# Altium PCB ACSR-RC-V2.0.PcbDoc (part 2 of 3)
Units mm, origin at the board's own origin, x right, y up, seen from the top; angles counter-clockwise.
Board outline 93 x 128 mm, 2 copper layers (Top Layer, Bottom Layer); 207 components, 178 nets, 884 pads, 664 vias.
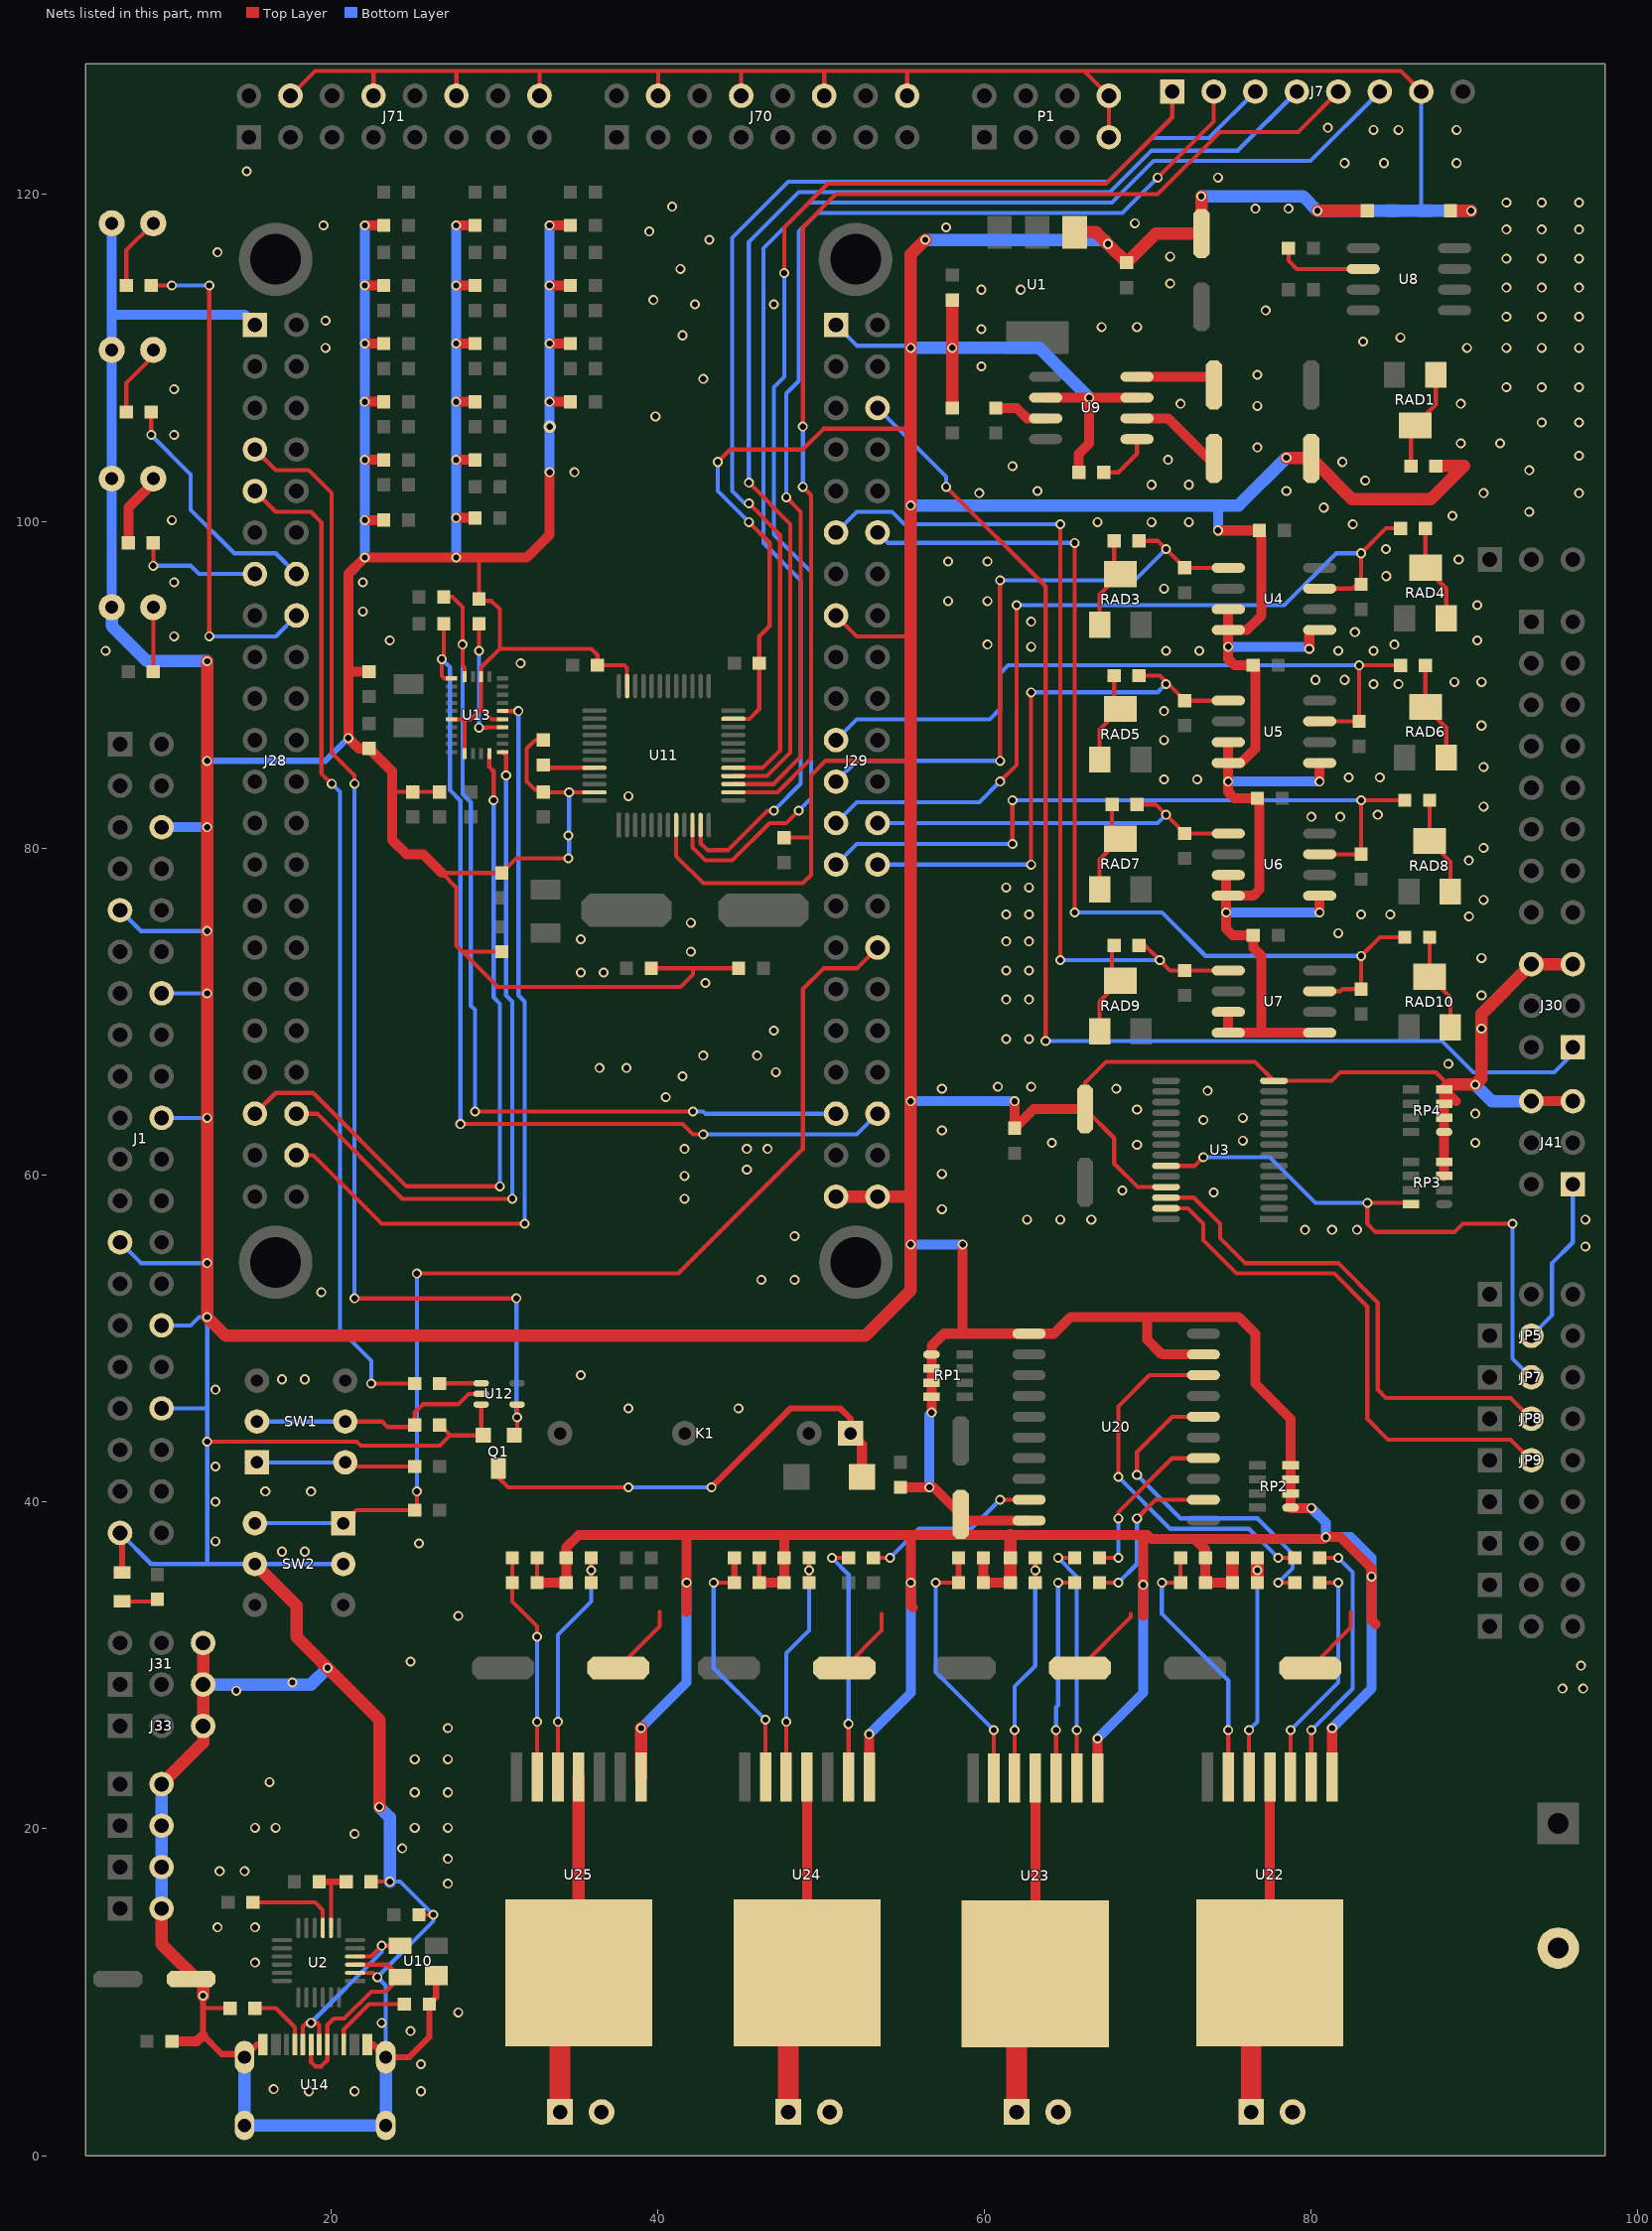
[diagram p2: the nets of this part, all layers, seen from the top]

## Via types
v1: diameter 0.61, hole 0.381, Top Layer to Bottom Layer, 661 vias
v2: diameter 0.762, hole 0.381, Top Layer to Bottom Layer, 3 vias

## Nets (pads, with @x,y where several pads share a name; then routed paths per layer and width w, separated by ;. In a path a pad name is that pad's centre, name@x,y a point inside that pad or via, vN(x,y) a via of type N, cw(c..) or ccw(c..) an arc to the next point about the centre after c; other vN are vias at no path point) (continued)
BNO_NRST: J28.42 U13.11 | length 48.2
  Top Layer w0.254: J28.42@17.907,61.214 18.923,61.214 23.114,57.023 v1(31.877,57.023) ; U13.11@30.518,88.388 v1(31.492,88.388)
  Bottom Layer w0.254: v1(31.492,88.388) 31.496,88.384 31.496,70.993 31.877,70.612 v1(31.877,57.023)
BNO_P0: J28.40 U13.6 | length 43
  Top Layer w0.254: J28.40@17.907,63.754 19.177,63.754 24.384,58.547 v1(31.115,58.547) ; U13.6@30.518,85.888 30.734,85.672 v1(30.734,84.455)
  Bottom Layer w0.254: v1(30.734,84.455) 30.734,70.993 31.115,70.612 v1(31.115,58.547)
BNO_P1: J28.39 U13.5 | length 44.6
  Top Layer w0.254: J28.39@15.367,63.754 16.637,65.024 18.923,65.024 24.638,59.309 v1(30.353,59.309) ; U13.5@29.706,85.776 29.706,84.975 29.972,84.709 v1(29.972,82.931)
  Bottom Layer w0.254: v1(29.972,82.931) 29.972,70.866 30.353,70.485 v1(30.353,59.309)
BNO_SCL: J29.39 R51.1 U13.19 | length 56.7
  Top Layer w0.254: R51.1@26.924,95.377 27.432,95.377 28.067,94.742 v1(28.067,92.456) 28.067,91.186 28.206,91.047 U13.19@28.206,90.5 ; v1(28.829,63.881) v1(42.164,63.881)
  Bottom Layer w0.254: v1(28.067,92.456) 28.067,83.312 28.575,82.804 28.575,70.358 28.829,70.104 v1(28.829,63.881) ; v1(42.164,63.881) 42.799,63.881 42.926,63.754 J29.39@50.927,63.754
BNO_SDA: J29.40 R52.1 U13.20 | length 59.1
  Top Layer w0.254: v1(26.797,91.567) 26.797,90.551 26.96,90.388 U13.20@27.394,90.388 ; R52.1@26.797,93.599 R52.1@26.924,93.726 ; v1@26.924,91.44 R52.1@26.924,93.472 ; v1(27.94,63.119) 41.529,63.119 42.164,62.484 v1(42.799,62.484)
  Bottom Layer w0.254: v1(26.797,91.567) 27.305,91.059 27.305,83.535 27.94,82.9 v1(27.94,63.119) ; v1(42.799,62.484) 52.197,62.484 J29.40@53.467,63.754
BTN7970_OUTPUT_0: J2.1 U22.4 U22.8 | length 21
  Top Layer w0.61: U22.8@77.47,11.176 U22.4@77.47,23.176
  Top Layer w1.27: J2.1@76.327,2.667 76.327,10.033 U22.8@77.47,11.176
BTN7970_OUTPUT_1: J4.1 U23.4 U23.8 | length 20.9
  Top Layer w0.61: U23.8@63.119,11.114 U23.4@63.119,23.114
  Top Layer w1.27: J4.1@61.976,2.667 61.976,9.971 U23.8@63.119,11.114
BTN7970_OUTPUT_2: J5.1 U24.4 U24.8 | length 21
  Top Layer w0.61: U24.8@49.149,11.176 U24.4@49.149,23.176
  Top Layer w1.27: J5.1@48.006,2.667 48.006,10.033 U24.8@49.149,11.176
BTN7970_OUTPUT_3: J6.1 U25.4 U25.8 | length 21
  Top Layer w0.762: U25.8@35.179,11.176 U25.4@35.179,23.176
  Top Layer w1.27: J6.1@34.036,2.667 34.036,10.033 U25.8@35.179,11.176
D+: U2.3 U10.4 U14.A6 U14.B6 | length 13.2
  Top Layer w0.254: U14.A6@18.8,6.792 18.8,5.711 19.05,5.461 19.431,5.461 19.8,5.83 U14.B6@19.8,6.792 19.8,7.989 20.193,8.382 20.828,8.382 22.479,10.033 23.368,10.033 U10.4@24.257,10.922 23.495,11.684 U2.3@21.493,11.684
D-: U2.4 U10.3 U14.A7 U14.B7 | length 13
  Top Layer w0.254: U14.B7@18.3,6.792 18.3,7.886 18.542,8.128 v1(18.796,8.128) 19.177,8.128 19.304,8.001 19.304,6.796 U14.A7@19.3,6.792 ; U2.4@21.493,12.184 22.471,12.184 v1(23.129,12.842) U10.3@24.257,12.842
  Bottom Layer w0.254: v1(18.796,8.128) 23.129,12.461 v1(23.129,12.842)
ESC_INPUT: J29.6 J30.1 | length 76.9
  Top Layer w0.254: v1(57.658,102.108) 63.754,96.012 v1(63.754,68.199)
  Bottom Layer w0.254: J29.6@53.467,106.934 57.658,102.743 v1(57.658,102.108) ; v1(63.754,68.199) 88.011,68.199 89.916,66.294 94.869,66.294 96.012,67.437 J30.1@96.012,67.818
ESC_OUTPUT: J41.1 JP5.2 | length 10.3
  Bottom Layer w0.254: JP5.2@93.472,50.165 94.742,51.435 94.742,54.61 96.012,55.88 J41.1@96.012,59.436
FORCE00: C11.1 J29.23 R7.2 U4.1 | length 38.1
  Top Layer w0.254: v1(60.96,85.344) v1(60.96,96.393) ; R7.2@69.469,98.806 70.612,98.806 v1(71.12,98.298) C11.1@72.263,97.155 U4.1@74.295,97.155
  Bottom Layer w0.254: J29.23@50.927,84.074 52.197,85.344 v1(60.96,85.344) ; v1(60.96,96.393) 69.215,96.393 v1(71.12,98.298)
FORCE01: C12.1 J29.25 R8.1 U4.7 | length 52.8
  Top Layer w0.254: v1(60.96,84.074) 61.976,85.09 v1(61.976,94.869) ; U4.7@80.518,95.885 82.55,95.885 83.058,96.393 v1(83.058,98.044) 84.582,99.568 R8.1@85.471,99.568
  Top Layer w0.61: U4.7@79.883,95.885 U4.7@80.518,95.885
  Bottom Layer w0.254: J29.25@50.927,81.534 52.197,82.804 59.69,82.804 v1(60.96,84.074) ; v1(61.976,94.869) 78.359,94.869 81.534,98.044 v1(83.058,98.044)
FORCE02: C13.1 J29.28 R9.2 U5.1 | length 34.4
  Top Layer w0.254: v1(62.865,78.994) v1(62.865,89.535) ; R9.2@69.469,90.551 70.739,90.551 C13.1@72.263,89.027 U5.1@74.803,89.027
  Bottom Layer w0.254: J29.28@53.467,78.994 v1(62.865,78.994) ; v1(62.865,89.535) 70.612,89.535 v1(71.12,90.043)
FORCE03: C14.1 J29.21 R10.1 U5.7 | length 44.1
  Top Layer w0.254: U5.7@80.391,87.757 U5.7@80.518,87.757 82.677,87.757 C14.1@82.804,87.884 ; C14.1@82.931,87.757 v1(82.931,91.186) R10.1@85.471,91.186
  Top Layer w0.61: U5.7@79.883,87.757 U5.7@80.391,87.757
  Bottom Layer w0.254: J29.21@50.927,86.614 52.197,87.884 60.325,87.884 60.96,88.519 60.96,90.678 61.468,91.186 v1(82.931,91.186)
FORCE04: C15.1 J29.26 R11.2 U6.1 | length 24.2
  Top Layer w0.254: R11.2@69.342,82.677 70.485,82.677 v1(71.12,82.042) C15.1@72.263,80.899 U6.1@74.93,80.899
  Bottom Layer w0.254: J29.26@53.467,81.534 70.612,81.534 v1(71.12,82.042)
FORCE05: C16.1 J29.27 R12.1 U6.7 | length 43.8
  Top Layer w0.254: v1(61.722,80.264) v1(61.722,82.931) ; U6.7@80.518,79.629 C16.1@83.058,79.629 v1(83.058,82.931) R12.1@85.725,82.931
  Bottom Layer w0.254: J29.27@50.927,78.994 52.197,80.264 v1(61.722,80.264) ; v1(61.722,82.931) v1(83.058,82.931)
FORCE06: C17.1 J29.11 R13.2 U7.1 | length 53.2
  Top Layer w0.254: v1@64.643,73.406 v1(64.643,99.822) ; R13.2@69.469,74.041 69.85,74.041 v1(70.739,73.152) 71.374,72.517 C17.1@72.263,72.517 U7.1@74.93,72.517
  Bottom Layer w0.254: J29.11@50.927,99.314 52.197,100.584 54.356,100.584 55.118,99.822 v1(64.643,99.822) ; v1(64.643,73.152) v1(70.739,73.152)
FORCE07: C18.1 J29.12 R14.1 U7.7 | length 61.3
  Top Layer w0.254: v1(65.532,76.073) v1(65.532,98.679) ; U7.7@80.518,71.247 81.788,71.247 81.915,71.374 C18.1@83.058,71.374 v1(83.058,73.406) 84.201,74.549 R14.1@85.725,74.549
  Bottom Layer w0.254: J29.12@53.467,99.314 54.102,98.679 v1(65.532,98.679) ; v1(65.532,76.073) 70.866,76.073 73.533,73.406 v1(83.058,73.406)
GND: C1.1 C2.2 C3.1 C5.1 C6.1 C7.1 C8.1 C9.1 C10.1 C19.2 C20.2 C21.2 C22.2 C23.2 C24.2 C25.2 C26.2 C27.2 C28.2 C29.2 C30.2 C31.2 C32.2 C33.2 C34.2 C35.1 C36.2 C37.2 C38.2 C39.2 C40.2 C41.1 C42.1 C43.2 C44.1 C45.2 C46.1 C47.1 C48.1 C49.1 C50.1 C51.1 C52.1 C53.1 C54.2 C55.2 C56.2 C57.2 C58.2 C59.2 C60.2 C61.1 C62.1 C63.1 C64.1 C65.1 C66.1 C67.1 C68.1 J1.6 J1.9 J1.14 J1.20 J1.25 J1.30 J1.34 J1.39 J2.2 J3.2 J4.2 J5.2 J6.2 J7.7 J28.1 J29.1 J29.15 J29.43 J29.44 J30.5 J30.6 J31.5 J31.6 J33.3 J41.5 J41.6 J50.2 J51.2 J52.2 J55.2 J70.4 J70.8 J70.12 J70.16 J71.4 J71.8 J71.12 J71.16 LED1.2 LED2.2 LED3.2 LED4.2 LED5.2 P1.7 P1.8 Q1.2 R1.1 R2.1 R4.1 R5.1 R35.1 R36.1 R38.1 R39.1 R41.1 R42.1 R44.1 R45.1 R49.2 R58.1 R65.2 RP1.1 RP1.2 RP1.3 RP1.4 RP2.1 RP2.2 RP2.3 RP2.4 RP3.3 RP3.4 RP4.1 RP4.2 RP4.3 RP4.4 SW2.2 SW2.5 U1.1 U2.2 U3.14 U3.25 U4.3 U4.4 U4.5 U5.3 U5.4 U5.5 U6.3 U6.4 U6.5 U7.3 U7.4 U7.5 U9.3 U9.6 U10.1 U11.8 U11.23 U11.35 U11.47 U12.3 U13.2 U13.10 U13.17 U13.25 U14.0 U14.1 U14.2 U14.3 U14.A1 U14.A12 U14.B1 U14.B12 U20.1 U20.10 U20.19 U22.1 U23.1 U24.1 U25.1 | length 1235.5
  Top Layer w0.254: 12.192,9.017 R5.1@13.843,9.017 ; v1(12.446,43.688) 21.59,43.688 21.844,43.434 26.67,43.434 27.305,44.069 ; J71.4@17.238,126.04 J71.4@17.389,126.191 ; J71.4@17.54,126.04 19.056,127.556 22.606,127.556 ; U2.2@21.493,11.184 22.598,11.184 v1(22.86,10.922) ; R65.2@22.479,16.764 v1(23.622,16.764) ; J71.8@22.62,126.04 22.62,127.542 22.606,127.556 ; 23.876,81.407 23.876,83.439 C53.1@25.019,83.439 C52.1@26.67,83.439 ; C42.1@25.4,14.732 v1(26.289,14.732) ; R49.2@26.67,44.704 27.305,44.069 ; U13.25@27.394,87.888 28.571,87.888 29.206,88.523 ; J71.12@27.7,126.04 27.7,127.542 27.686,127.556 ; U13.2@28.206,85.776 28.206,87.884 ; 29.083,97.79 C54.2@29.083,95.25 29.21,95.123 29.845,95.123 30.353,94.615 30.353,92.202 ; Q1.2@29.21,44.196 U12.3@29.21,45.959 ; Q1.2@29.337,44.069 27.305,44.069 ; C60.2@30.48,73.66 28.067,73.66 ; U13.10@30.518,87.888 29.841,87.888 29.206,88.523 ; R45.1@32.639,35.052 C67.1@32.639,36.576 ; J71.16@32.78,126.04 32.78,127.542 32.766,127.556 ; R1.1@33.02,86.614 32.512,86.614 32.004,86.106 32.004,84.074 32.512,83.566 32.893,83.566 C51.1@33.02,83.439 33.043,83.416 v1(34.592,83.416) U11.47@36.14,83.416 ; v1(34.544,79.375) 31.369,79.375 C59.2@30.48,78.486 26.797,78.486 27.686,77.597 27.686,74.041 28.067,73.66 ; C39.2@37.592,29.845 40.132,32.385 40.132,33.274 ; U11.35@38.14,89.916 38.14,91.019 37.973,91.186 C35.1@36.322,91.186 36.322,91.821 35.941,92.202 30.353,92.202 ; C57.2@39.624,72.644 42.164,72.644 ; J70.4@40.04,126.04 40.04,127.52 40.005,127.556 ; U11.8@41.14,81.416 41.14,79.51 42.799,77.851 48.895,77.851 49.403,78.359 49.403,80.645 ; v1(43.688,103.632) 44.45,104.394 48.895,104.394 50.165,105.664 55.499,105.664 ; U11.23@44.64,87.916 45.625,87.916 46.228,88.519 C49.1@46.228,91.313 46.228,92.964 46.863,93.599 46.863,98.679 v1(45.593,99.949) ; C58.2@44.958,72.644 42.164,72.644 ; J70.8@45.12,126.04 45.12,127.52 45.085,127.556 ; R42.1@46.228,35.052 C65.1@46.228,36.576 ; C50.1@47.752,80.645 49.403,80.645 ; J70.12@50.2,126.04 50.2,127.52 50.165,127.556 ; J29.15@50.927,94.234 52.197,92.964 55.499,92.964 ; C38.2@51.435,29.845 53.721,32.131 53.721,33.147 ; J70.16@55.28,126.04 55.28,127.52 55.245,127.556 ; 55.499,85.344 50.292,85.344 49.403,84.455 49.403,80.645 ; C37.2@65.852,29.845 68.961,32.954 68.961,33.147 ; P1.7@67.62,123.5 P1.8@67.62,126.04 66.105,127.556 ; U3.25@71.12,59.264 69.387,59.264 67.945,60.706 67.945,62.262 C43.2@66.167,64.04 66.167,65.659 67.437,66.929 76.559,66.929 U3.14@77.724,65.764 81.258,65.764 81.788,66.294 87.63,66.294 88.138,65.786 RP4.4@88.138,65.227 ; C36.2@79.949,29.845 82.423,32.319 82.423,33.274 ; J7.7@86.614,126.167 J7.7@86.741,126.04 ; J7.7@86.741,126.294 85.479,127.556 66.105,127.556 ; 22.606,127.556 27.686,127.556 ; 27.686,127.556 32.766,127.556 ; 28.067,73.66 30.226,71.501 41.402,71.501 42.164,72.263 42.164,72.644 ; 29.206,88.523 U13.17@29.206,90.5 29.206,91.055 30.353,92.202 ; 32.766,127.556 40.005,127.556 ; 40.005,127.556 45.085,127.556 ; 45.085,127.556 50.165,127.556 ; 50.165,127.556 55.245,127.556 ; 55.245,127.556 66.105,127.556
  Top Layer w0.381: J1.39@7.112,38.1 7.239,37.973 LED5.2@7.239,35.687 ; v1(12.192,9.779) 12.192,9.017 12.192,7.366 13.335,6.223 14.526,6.223 U14.0@14.725,6.024 15.493,6.792 U14.A1@15.7,6.792 ; U14.A12@22.4,6.792 22.607,6.792 U14.1@23.375,6.024 24.82,6.024 26.035,7.239 R4.1@26.035,9.271 26.457,9.693 U10.1@26.457,11.022
  Top Layer w0.61: C41.1@10.287,6.985 11.811,6.985 12.192,7.366 ; v1(22.098,100.076) C32.2@23.241,100.076 ; v1(22.098,103.759) C31.2@23.241,103.759 ; v1(22.098,107.315) C30.2@23.241,107.315 ; v1(22.098,110.871) C29.2@23.241,110.871 ; v1(22.098,114.427) C28.2@23.241,114.427 ; v1(22.098,118.11) C27.2@23.241,118.11 ; C56.2@22.352,90.805 21.082,90.805 ; 26.797,78.486 25.654,79.629 24.638,79.629 23.749,80.518 23.749,84.709 C55.2@22.352,86.106 21.717,86.106 v1(21.082,86.741) 21.082,90.805 ; v1(27.686,100.203) C22.2@28.829,100.203 ; v1(27.686,103.759) C21.2@28.829,103.759 ; v1(27.686,107.315) C20.2@28.829,107.315 ; v1(27.686,110.871) C19.2@28.829,110.871 ; v1(27.686,114.427) C34.2@28.829,114.427 ; v1(27.686,118.11) C33.2@28.829,118.11 ; R45.1@32.639,35.052 R44.1@34.417,35.052 ; v1(33.401,102.997) 33.401,99.187 32.004,97.79 29.083,97.79 v1(27.686,97.79) v1(22.098,97.79) 21.082,96.774 21.082,90.805 ; v1(33.401,107.315) C26.2@34.671,107.315 ; v1(33.401,110.871) C25.2@34.671,110.871 ; v1(33.401,114.427) C24.2@34.671,114.427 ; v1(33.401,118.11) C23.2@34.671,118.11 ; R44.1@34.417,35.306 C66.1@34.417,36.576 34.417,37.211 35.179,37.973 41.783,37.973 ; 41.783,33.274 v1(41.783,35.052) 41.783,37.973 ; R42.1@46.228,35.052 R41.1@47.752,35.052 C64.1@47.752,36.576 47.752,37.973 ; U24.1@52.959,23.176 v1(52.959,25.781) ; C46.1@54.864,40.894 v1(56.642,40.894) 56.896,40.894 C45.2@58.547,39.243 58.928,38.862 U20.10@62.738,38.862 ; 55.626,33.528 55.499,33.655 v1(55.499,35.052) 55.499,37.719 55.245,37.973 ; v1(56.769,45.466) RP1.4@56.769,46.431 RP1.3@56.769,47.295 RP1.2@56.769,48.158 RP1.1@56.769,49.022 56.769,49.53 57.531,50.292 58.547,50.292 ; v1(58.674,55.753) 58.674,50.419 58.547,50.292 ; C63.1@59.944,36.576 R39.1@59.944,35.052 R38.1@61.595,35.052 ; v1(61.849,64.516) C44.1@61.849,62.865 63.024,64.04 C43.2@66.167,64.04 ; U9.6@63.754,107.569 v1(66.421,107.569) ; R58.1@65.786,102.997 65.786,104.14 66.421,104.775 v1(66.421,107.569) ; U23.1@66.929,23.114 v1(66.929,25.527) ; U9.3@69.342,107.569 v1(66.421,107.569) ; 69.723,33.02 v1(69.723,34.925) 69.723,37.719 69.977,37.973 ; U20.19@73.406,49.022 70.866,49.022 69.977,49.911 69.977,51.308 ; v1(74.295,99.441) C7.1@76.835,99.441 ; U7.3@74.93,69.977 U7.4@74.93,68.707 76.962,68.707 ; U6.3@74.93,78.359 74.803,78.232 U6.4@74.803,77.089 ; U5.3@74.93,86.487 U5.4@74.93,85.217 ; U4.3@74.93,94.615 U4.4@74.93,93.345 ; R35.1@75.184,35.052 R36.1@73.533,35.052 C68.1@73.533,36.576 73.533,37.084 72.898,37.719 ; C8.1@76.454,91.186 75.311,91.186 74.93,91.567 v1(74.93,92.329) U4.4@74.93,93.345 ; C8.1@76.581,91.186 76.581,86.106 75.692,85.217 U5.4@74.93,85.217 ; C7.1@76.708,99.314 76.962,99.06 76.962,94.234 76.073,93.345 U4.4@74.93,93.345 ; v1(79.883,92.202) U4.5@79.883,93.345 ; v1(80.01,39.624) 78.765,39.624 RP2.1@78.74,39.649 RP2.2@78.74,40.513 RP2.3@78.74,41.377 RP2.4@78.74,42.24 78.74,45.085 76.581,47.244 76.581,50.292 75.565,51.308 69.977,51.308 ; U7.5@80.518,68.707 76.962,68.707 ; v1(80.518,76.073) U6.5@80.518,77.089 ; v1(80.518,84.074) U5.5@80.518,85.217 ; U22.1@81.28,23.176 v1(81.28,26.162) ; 83.947,32.512 83.693,32.766 v1(83.693,35.433) 83.693,35.941 81.788,37.846 v1(80.899,37.846) 80.772,37.719 72.898,37.719 ; RP3.3@88.138,59.944 RP3.4@88.138,60.808 RP4.1@88.138,62.636 RP4.2@88.138,63.5 RP4.3@88.138,64.364 RP4.4@88.138,65.227 88.849,64.516 ; J41.6@93.472,64.516 J41.5@96.012,64.516 ; 41.783,37.973 47.752,37.973 ; 47.752,37.973 55.245,37.973 ; 55.245,37.973 61.595,37.973 69.977,37.973 ; 58.547,50.292 U20.1@62.738,50.292 64.262,50.292 65.278,51.308 69.977,51.308 ; 69.977,37.973 70.231,37.719 72.898,37.719 ; U6.4@74.803,77.089 U6.4@74.93,77.089 76.454,77.089 76.835,77.47 76.835,83.058 C9.1@76.708,83.058 75.311,83.058 74.93,83.439 v1(74.93,84.074) U5.4@74.93,85.217 ; U6.4@74.803,77.089 v1(74.803,76.073) 74.803,75.057 75.184,74.676 C10.1@76.454,74.676 76.454,73.914 76.962,73.406 76.962,68.707
  Top Layer w0.762: J55.2@9.652,15.113 9.652,12.954 12.192,10.414 v1(12.192,9.779) ; J50.2@9.652,22.733 12.192,25.273 J33.3@12.192,26.289 ; J33.3@12.128,26.352 12.192,26.416 J31.5@12.192,28.829 J31.6@12.192,31.369 ; v1(12.446,91.44) v1(12.446,85.344) v1(12.446,81.28) v1(12.446,74.93) v1(12.446,71.12) v1(12.446,63.5) v1(12.446,54.61) v1(12.446,51.308) 13.589,50.165 52.705,50.165 55.499,52.959 v1(55.499,55.753) 55.499,58.674 ; SW2.5@15.367,36.195 17.907,33.655 17.907,31.75 v1(19.812,29.845) 22.987,26.67 v1(22.987,21.336) ; U25.1@38.989,23.176 v1(38.989,26.162) ; J29.43@50.927,58.674 J29.44@53.467,58.674 55.499,58.674 ; v1(56.388,117.221) 55.499,116.332 v1(55.499,110.617) 55.499,105.664 v1(55.499,100.965) 55.499,92.964 55.499,85.344 v1(55.499,64.516) 55.499,58.674 ; C5.1@58.039,106.934 v1(58.039,110.617) C1.1@58.039,113.538 ; R38.1@61.595,35.052 C62.1@61.595,36.576 61.595,37.973 ; U1.1@65.529,117.692 66.839,117.692 v1(67.564,116.967) C3.1@68.707,115.824 70.485,117.602 C2.2@73.279,117.602 v1(73.279,119.888) ; R35.1@75.184,35.052 C61.1@75.184,36.576 ; v1(78.486,103.886) 79.978,103.886 C6.1@80.01,103.854 82.518,101.346 87.312,101.346 89.344,103.378 R2.1@87.63,103.378 ; v1(80.391,118.999) C48.1@83.439,118.999 ; RP4.4@88.138,65.227 88.443,65.532 v1(90.043,65.532) 90.424,65.913 v1(90.424,68.961) 90.424,69.85 J30.6@93.472,72.898 J30.5@96.012,72.898 ; C47.1@88.519,118.999 v1(89.789,118.999)
  Bottom Layer w0.254: J1.39@7.112,38.1 9.017,36.195 12.446,36.195 ; J1.25@7.112,55.88 8.382,54.61 v1(12.446,54.61) ; J1.9@7.112,76.2 8.382,74.93 v1(12.446,74.93) ; J1.34@9.652,45.72 12.446,45.72 ; J1.30@9.652,50.8 11.43,50.8 11.938,51.308 v1(12.446,51.308) 12.446,45.72 ; J1.20@9.652,63.5 v1(12.446,63.5) ; J1.14@9.652,71.12 v1(12.446,71.12) ; SW2.2@20.767,36.195 SW2.5@15.367,36.195 12.446,36.195 ; U14.1@23.375,6.024 23.375,10.407 v1(22.86,10.922) 26.289,14.351 v1(26.289,14.732) 24.257,16.764 v1(23.622,16.764) ; v1(34.544,79.375) 34.592,79.423 v1(34.592,83.416) ; v1(43.688,103.632) 43.688,101.854 v1(45.593,99.949) ; J29.1@50.927,112.014 52.197,110.744 55.372,110.744 v1(55.499,110.617) ; 86.741,118.999 J7.7@86.741,126.294 ; 12.446,36.195 v1(12.446,43.688) 12.446,45.72
  Bottom Layer w0.381: v1(12.446,85.344) 19.685,85.344 v1(21.082,86.741)
  Bottom Layer w0.61: LED1.2@6.604,94.742 LED2.2@6.604,102.616 LED3.2@6.604,110.49 6.604,112.649 ; LED4.2@6.604,118.237 6.604,112.649 ; J1.6@9.652,81.28 v1(12.446,81.28) ; J28.1@15.367,112.014 14.732,112.649 6.604,112.649 ; v1(22.098,97.79) v1(22.098,100.076) v1(22.098,103.759) v1(22.098,107.315) v1(22.098,110.871) v1(22.098,114.427) v1(22.098,118.11) ; v1(27.686,97.79) v1(27.686,100.203) v1(27.686,103.759) v1(27.686,107.315) v1(27.686,110.871) v1(27.686,114.427) v1(27.686,118.11) ; v1(33.401,102.997) v2(33.401,105.791) v1(33.401,107.315) v1(33.401,110.871) v1(33.401,114.427) v1(33.401,118.11) ; v1(38.989,26.162) 41.783,28.956 v1(41.783,35.052) ; v1(52.959,25.781) 55.499,28.321 v1(55.499,35.052) ; v1(55.499,55.753) v1(58.674,55.753) ; v1(55.499,64.516) v1(61.849,64.516) ; v1(56.642,40.894) 56.642,45.339 v1(56.769,45.466) ; v1(66.929,25.527) 69.723,28.321 v1(69.723,34.925) ; v1(74.295,99.441) 74.295,100.838 74.422,100.965 ; v1(74.803,76.073) v1(80.518,76.073) ; v1(74.93,84.074) v1(80.518,84.074) ; v1(74.93,92.329) 79.756,92.329 v1(79.883,92.202) ; v1(80.01,39.624) 80.899,38.735 v1(80.899,37.846) 82.423,37.846 83.693,36.576 v1(83.693,35.433) 83.693,28.575 v1(81.28,26.162)
  Bottom Layer w0.762: LED1.2@6.604,94.742 6.604,93.599 8.763,91.44 v1(12.446,91.44) ; J55.2@9.652,15.113 J52.2@9.652,17.653 J51.2@9.652,20.193 J50.2@9.652,22.733 ; J31.5@12.192,28.829 18.796,28.829 v1(19.812,29.845) ; U14.0@14.725,6.024 U14.3@14.725,1.844 U14.2@23.375,1.844 U14.1@23.375,6.024 ; v1(22.987,21.336) 23.622,20.701 v1(23.622,16.764) ; v1(55.499,100.965) 74.422,100.965 75.565,100.965 v1(78.486,103.886) ; v1(55.499,110.617) v1(58.039,110.617) 63.373,110.617 v1(66.421,107.569) ; v1(56.388,117.221) 67.31,117.221 v1(67.564,116.967) ; v1(73.279,119.888) 79.502,119.888 v1(80.391,118.999) 86.741,118.999 v1(89.789,118.999) ; v1(90.043,65.532) 91.059,64.516 J41.6@93.472,64.516
  other v1: 18.669,3.937 21.463,3.937 25.527,3.937 16.51,4.064 25.527,5.588 24.892,7.62 23.114,8.128 27.813,8.763 15.367,11.811 13.081,13.97 15.367,13.97 27.178,16.637 13.208,17.399 14.732,17.399 27.178,18.161 24.384,18.796 21.463,19.685 15.367,20.066 16.637,20.066 25.146,20.066 27.178,20.066 25.146,22.225 27.178,22.225 16.256,22.86 25.146,24.257 27.178,24.257 27.178,26.162 14.224,28.448 95.377,28.575 96.647,28.575 17.653,28.956 96.52,29.972 24.892,30.226 27.813,33.02 17.018,36.957 18.415,36.957 25.4,37.465 12.954,37.592 12.954,40.005 16.002,40.64 18.796,40.64 12.954,42.164 38.227,45.72 44.958,45.72 12.954,46.863 17.018,47.498 18.415,47.498 35.306,47.752 19.431,52.832 46.355,53.594 48.387,53.594 96.774,55.626 48.387,56.261 79.629,56.642 81.28,56.642 82.804,56.642 62.611,57.277 64.643,57.277 66.548,57.277 96.774,57.277 57.404,57.912 41.656,58.547 74.041,58.928 68.453,59.055 41.656,59.944 57.404,60.071 45.466,60.325 41.656,61.595 45.466,61.595 46.736,61.595 69.342,61.849 64.135,61.976 90.043,61.976 75.819,62.103 57.404,62.738 73.406,63.373 75.819,63.5 90.043,63.754 69.342,64.008 40.513,64.77 73.66,65.151 57.404,65.278 68.072,65.278 60.833,65.405 62.865,65.405 41.529,66.04 47.244,66.294 36.449,66.548 38.1,66.548 88.392,66.802 42.799,67.31 46.101,67.31 61.341,68.326 62.738,68.326 47.117,68.834 61.341,70.739 62.738,70.739 90.424,70.993 42.926,71.755 35.306,72.39 36.703,72.39 61.341,72.517 62.738,72.517 90.424,73.279 42.037,73.66 61.341,74.295 62.738,74.295 35.306,74.422 81.661,74.803 42.037,75.438 89.662,75.819 61.341,75.946 62.738,75.946 83.058,75.946 84.836,75.946 90.551,76.835 61.341,77.597 62.738,77.597 89.649,79.248 90.551,80.01 34.544,80.772 80.01,81.915 81.788,81.915 84.074,82.042 90.551,82.55 38.227,83.185 70.993,84.201 73.025,84.201 82.296,84.328 84.201,84.328 90.551,84.963 70.993,86.614 90.424,87.503 70.993,88.392 83.82,90.043 85.344,90.043 88.773,90.17 90.424,90.17 80.264,90.297 82.042,90.297 31.623,91.313 6.223,92.075 71.12,92.075 73.152,92.075 81.661,92.075 83.82,92.075 62.865,92.329 60.198,92.456 85.09,92.456 23.622,92.71 90.17,92.71 10.414,92.964 82.677,93.218 62.865,93.853 21.971,94.488 90.17,94.869 57.785,95.123 60.198,95.123 70.993,95.885 10.414,96.266 21.971,96.266 84.595,96.647 57.785,97.536 60.198,97.536 89.027,97.663 84.582,98.298 82.55,99.822 66.929,99.949 70.231,99.949 72.517,99.949 10.287,100.076 88.646,100.33 93.345,100.584 80.772,100.838 59.69,101.727 90.551,101.727 96.393,101.727 63.246,101.854 78.486,101.854 70.231,102.235 72.517,102.235 83.312,102.489 34.925,102.997 93.345,103.124 61.722,103.378 81.915,103.632 71.247,103.759 96.393,104.013 76.708,104.521 89.154,104.775 91.567,104.775 10.414,105.283 94.107,106.045 96.393,106.045 39.878,106.426 76.708,107.061 72.009,107.188 89.154,107.188 10.414,108.077 91.948,108.204 94.107,108.204 96.393,108.204 42.799,108.712 76.708,108.966 59.817,109.474 19.685,110.617 89.535,110.617 91.948,110.617 94.107,110.617 96.393,110.617 83.185,110.998 85.471,111.252 41.529,111.379 59.817,111.76 67.183,111.887 69.342,111.887 19.685,112.268 91.948,112.522 94.107,112.522 96.393,112.522 77.216,112.903 42.291,113.284 47.117,113.284 39.751,113.538 59.817,114.173 62.23,114.173 91.948,114.3 94.107,114.3 96.393,114.3 71.374,114.554 41.402,115.443 91.948,116.078 94.107,116.078 96.393,116.078 71.374,116.205 13.081,116.459 43.18,117.221 39.497,117.729 91.948,117.856 94.107,117.856 96.393,117.856 57.658,117.983 19.558,118.11 69.215,118.237 76.581,119.126 78.613,119.126 40.894,119.253 91.948,119.507 94.107,119.507 96.393,119.507 74.295,121.031 14.859,121.412 82.042,121.92 84.455,121.92 88.9,121.92 83.82,123.952 85.344,123.952 88.9,123.952 81.026,124.079
IS1: C68.2 R36.2 U22.6 | length 16.2
  Top Layer w0.254: v1(70.866,35.052) R36.2@72.009,35.052 C68.2@72.009,36.576 ; U22.6@74.93,23.176 v1(74.93,26.035)
  Bottom Layer w0.254: v1(70.866,35.052) 70.866,33.147 74.93,29.083 v1(74.93,26.035)
IS2: C63.2 R39.2 U23.6 | length 16.3
  Top Layer w0.254: v1(57.023,35.052) R39.2@58.42,35.052 ; U23.6@60.579,23.114 v1(60.579,26.035)
  Top Layer w0.381: R39.2@58.42,35.052 C63.2@58.42,36.576
  Bottom Layer w0.254: v1(57.023,35.052) 57.023,29.591 v1(60.579,26.035)
IS3: C65.2 R42.2 U24.6 | length 16
  Top Layer w0.254: v1(43.434,35.052) R42.2@44.704,35.052 ; U24.6@46.609,23.176 v1(46.609,26.67)
  Top Layer w0.381: R42.2@44.704,35.052 C65.2@44.704,36.576
  Bottom Layer w0.254: v1(43.434,35.052) 43.434,29.845 v1(46.609,26.67)
IS4: C67.2 R45.2 U25.6 | length 14
  Top Layer w0.254: C67.2@31.115,36.576 R45.2@31.115,35.052 31.115,33.909 32.639,32.385 v1(32.639,31.75) ; U25.6@32.639,23.176 v1(32.639,26.543)
  Bottom Layer w0.254: v1(32.639,26.543) v1(32.639,31.75)
LCD_CS: J7.6 U11.11 | length 84.5
  Top Layer w0.254: U11.11@42.64,81.416 42.64,80.296 43.053,79.883 44.323,79.883 46.736,82.296 v1(47.117,82.296)
  Bottom Layer w0.254: v1(47.117,82.296) 48.768,83.947 48.768,96.393 46.482,98.679 46.482,116.713 49.276,119.507 67.818,119.507 70.358,122.047 79.954,122.047 J7.6@84.201,126.294
LCD_DC: J7.4 U11.16 | length 73.7
  Top Layer w0.254: U11.16@44.64,84.416 46.697,84.416 48.133,85.852 48.133,99.822 v1(45.593,102.362)
  Bottom Layer w0.254: v1(45.593,102.362) 45.593,117.094 48.641,120.142 67.691,120.142 70.231,122.682 75.509,122.682 J7.4@79.121,126.294
LCD_LED: J7.1 U11.10 | length 74.8
  Top Layer w0.254: U11.10@42.14,81.416 42.14,80.034 42.926,79.248 44.577,79.248 46.863,81.534 47.879,81.534 v1(48.641,82.296) ; v1(47.752,115.189) 47.752,117.983 50.419,120.65 67.437,120.65 71.501,124.714 J7.1@71.501,126.294
  Bottom Layer w0.254: v1(47.752,115.189) 47.752,108.839 47.117,108.204 47.117,99.187 49.403,96.901 49.403,83.058 v1(48.641,82.296)
LCD_MOSI: J7.3 U11.17 | length 71.7
  Top Layer w0.254: U11.17@44.64,84.916 46.435,84.916 47.498,85.979 47.498,99.187 v1(45.593,101.092)
  Bottom Layer w0.254: v1(45.593,101.092) 45.339,101.092 44.577,101.854 44.577,117.348 48.006,120.777 67.564,120.777 70.231,123.444 73.731,123.444 J7.3@76.581,126.294
LCD_RST: J7.5 U11.14 | length 74.7
  Top Layer w0.254: U11.14@44.64,83.416 47.348,83.416 49.403,85.471 49.403,101.6 v1(48.895,102.108) ; v1(48.895,105.791) 48.895,117.983 50.927,120.015 70.612,120.015 74.422,123.825 79.192,123.825 J7.5@81.661,126.294
  Bottom Layer w0.254: v1(48.895,102.108) 49.022,102.235 48.895,102.362 v1(48.895,105.791)
LCD_SCK: J7.2 U11.15 | length 67.7
  Top Layer w0.254: U11.15@44.64,83.916 47.086,83.916 48.768,85.598 48.768,100.584 v1(47.879,101.473) ; v1(70.612,121.031) 74.041,124.46 J7.2@74.041,126.294
  Bottom Layer w0.254: v1(47.879,101.473) 47.879,107.823 48.641,108.585 48.641,117.729 49.784,118.872 68.453,118.872 v1(70.612,121.031)
LED_BLUE: J28.16 R18.2 | length 30.9
  Top Layer w0.254: R18.2@9.017,114.427 v1(10.287,114.427) ; v1(12.573,92.964) v1(12.573,114.427)
  Bottom Layer w0.254: v1(10.287,114.427) v1(12.573,114.427) ; v1(12.573,92.964) 16.637,92.964 J28.16@17.907,94.234
LED_RED: J28.13 R16.2 | length 7.8
  Top Layer w0.254: v1(9.144,97.282) R16.2@9.144,98.679
  Bottom Layer w0.254: v1(9.144,97.282) 11.43,97.282 11.938,96.774 J28.13@15.367,96.774
LED_YELLOW: J28.14 R17.2 | length 15.1
  Top Layer w0.254: v1(9.017,105.283) R17.2@9.017,106.68
  Bottom Layer w0.254: v1(9.017,105.283) 11.43,102.87 11.43,100.711 14.097,98.044 16.637,98.044 J28.14@17.907,96.774
MANUAL_INPUT: J28.7 Q1.1 U12.4 | length 74.8
  Top Layer w0.254: J28.7@15.367,104.394 16.637,103.124 18.669,103.124 20.066,101.727 20.066,85.852 21.463,84.455 v1(21.463,83.947) ; v1(21.463,52.451) v1(31.369,52.451) ; Q1.1@31.242,44.069 31.41,44.237 v1(31.41,45.171) U12.4@31.41,45.959
  Bottom Layer w0.254: v1(21.463,52.451) v1(21.463,83.947) ; v1(31.369,52.451) 31.369,45.212 v1(31.41,45.171)
MANUAL_OUTPUT: J28.9 R47.2 | length 61.5
  Top Layer w0.254: J28.9@15.367,101.854 16.637,100.584 18.796,100.584 19.431,99.949 19.431,84.582 v1(20.066,83.947) ; v1(22.479,47.244) R47.2@25.146,47.244
  Bottom Layer w0.254: v1(20.066,83.947) 20.574,83.439 20.574,50.546 22.479,48.641 v1(22.479,47.244)
NetC4_1: C4.1 U9.2 | length 5.7
  Top Layer w0.61: U9.2@69.342,106.299 71.247,106.299 73.692,103.854 C4.1@74.041,103.854
NetC4_2: C4.2 U9.4 | length 4.8
  Top Layer w0.61: U9.4@69.342,108.839 73.787,108.839 C4.2@74.041,109.093
NetC54_1: C54.1 U13.9 | length 7.8
  Top Layer w0.254: v1(29.083,87.376) 29.591,87.376 29.603,87.388 U13.9@30.518,87.388 ; v1(29.083,92.075) C54.1@29.083,93.726
  Bottom Layer w0.254: v1(29.083,87.376) v1(29.083,92.075)
NetC61_2: C61.2 R35.2 U22.5 | length 15
  Top Layer w0.254: U22.5@76.2,23.176 v1(76.2,26.035) ; v1@76.485,35.814 v1(76.708,35.814) ; R35.2@76.708,35.052 R35.2@76.835,35.179
  Top Layer w0.762: R35.2@76.708,35.052 v1(76.708,35.814) C61.2@76.708,36.576
  Bottom Layer w0.254: v1@76.073,26.162 v1(76.2,26.035) 76.708,26.543 v1(76.708,35.814)
NetC62_2: C62.2 R38.2 U23.5 | length 14.8
  Top Layer w0.254: U23.5@61.849,23.114 v1(61.849,26.035) ; R38.2@63.119,35.052 v1(63.119,35.814) C62.2@63.119,36.576
  Bottom Layer w0.254: v1(61.849,26.035) 61.849,28.702 63.119,29.972 v1(63.119,35.814)
NetC64_2: C64.2 R41.2 U24.5 | length 14.7
  Top Layer w0.254: U24.5@47.879,23.176 v1(47.879,26.543) ; R41.2@49.276,35.052 v1(49.276,35.814) C64.2@49.276,36.576
  Bottom Layer w0.254: v1(47.879,26.543) 47.879,30.734 49.276,32.131 v1(49.276,35.814)
NetC66_2: C66.2 R44.2 U25.5 | length 14.6
  Top Layer w0.254: U25.5@33.909,23.176 v1(33.909,26.543) ; R44.2@35.941,35.306 v1(35.941,35.814) C66.2@35.941,36.449
  Bottom Layer w0.254: v1(33.909,26.543) 33.909,31.877 35.941,33.909 v1(35.941,35.814)
NetD1_1: D1.1 K1.1 Q1.3 | length 28.4
  Top Layer w0.254: Q1.3@30.277,42.037 30.277,41.478 30.861,40.894 v1(38.227,40.894)
  Top Layer w0.381: v1(43.307,40.894) 48.133,45.72 51.181,45.72 51.816,45.085 K1.1@51.816,44.196
  Top Layer w0.61: K1.1@51.816,44.196 52.514,43.498 D1.1@52.514,41.529
  Bottom Layer w0.254: v1(38.227,40.894) v1(43.307,40.894)
NetJ29_32: J29.32 R57.2 SW2.1 SW2.6 | length 67.5
  Top Layer w0.254: SW2.1@20.767,38.695 21.569,39.497 R57.2@25.146,39.497 25.273,39.624 v1(25.273,40.64) ; v1(25.273,53.975) 41.275,53.975 48.895,61.595 48.895,71.374 50.165,72.644 52.197,72.644 J29.32@53.467,73.914
  Bottom Layer w0.254: SW2.6@14.732,38.695 SW2.6@15.367,38.695 SW2.1@20.767,38.695 ; v1(25.273,40.64) v1(25.273,53.975)
NetJP7_2: JP7.2 RP3.8 U3.23 | length 36.8
  Top Layer w0.254: U3.23@71.12,60.564 72.883,60.564 v1(73.406,61.087) ; RP3.8@86.106,58.217 86.03,58.293 v1(83.439,58.293) 83.439,57.023 83.947,56.515 88.773,56.515 89.281,57.023 v1(92.329,57.023)
  Bottom Layer w0.254: v1(73.406,61.087) 77.47,61.087 80.264,58.293 v1(83.439,58.293) ; v1(92.329,57.023) 92.329,48.768 JP7.2@93.472,47.625
NetJP8_2: JP8.2 U3.26 | length 31.6
  Top Layer w0.254: U3.26@71.12,58.614 72.831,58.614 74.422,57.023 74.422,56.134 75.946,54.61 81.661,54.61 84.074,52.197 84.074,46.863 84.582,46.355 92.202,46.355 JP8.2@93.472,45.085
NetJP9_2: JP9.2 U3.27 | length 33.4
  Top Layer w0.254: U3.27@71.12,57.964 72.465,57.964 73.406,57.023 73.406,56.007 75.438,53.975 81.407,53.975 83.439,51.943 83.439,45.085 84.709,43.815 92.202,43.815 JP9.2@93.472,42.545
NetLED1_1: LED1.1 R15.1 | length 3.9
  Top Layer w0.254: R15.1@9.144,90.805 LED1.1@9.144,94.742
NetLED2_1: LED2.1 R16.1 | length 4.6
  Top Layer w0.61: R16.1@7.62,98.679 7.62,100.838 9.144,102.362 LED2.1@9.144,102.616
NetLED3_1: LED3.1 R17.1 | length 4.5
  Top Layer w0.254: R17.1@7.493,106.68 7.493,108.458 9.144,110.109 LED3.1@9.144,110.49
NetLED4_1: LED4.1 R18.1 | length 4.5
  Top Layer w0.254: R18.1@7.493,114.427 7.493,116.586 LED4.1@9.144,118.237
NetLED5_1: LED5.1 R66.1 | length 2.2
  Top Layer w0.254: LED5.1@7.239,33.909 9.271,33.909 R66.1@9.398,34.036
NetR1_2: R1.2 U11.44 | length 3.1
  Top Layer w0.254: R1.2@33.02,84.916 U11.44@36.14,84.916
NetR2_2: R2.2 RAD1.1 RAD1.2 | length 6.2
  Top Layer w0.254: R2.2@86.106,103.378 86.106,105.612 RAD1.2@86.36,105.866 87.63,107.136 RAD1.1@87.63,108.966
NetR3_1: R3.1 U8.2 | length 5.5
  Top Layer w0.254: R3.1@78.613,116.713 78.613,115.951 79.121,115.443 U8.2@83.185,115.443
NetR4_2: R4.2 U14.B5 | length 5.3
  Top Layer w0.254: U14.B5@20.8,6.792 20.8,7.719 22.352,9.271 R4.2@24.511,9.271
NetR5_2: R5.2 U14.A5 | length 4
  Top Layer w0.254: R5.2@15.367,9.017 16.637,9.017 17.8,7.854 U14.A5@17.8,6.792
NetR6_2: R6.2 R65.1 U2.8 | length 4.5
  Top Layer w0.254: U2.8@20.018,13.934 20.018,16.716 20.066,16.764
  Top Layer w0.381: R6.2@19.304,16.764 20.066,16.764 R65.1@20.955,16.764
NetR7_1: R7.1 RAD3.1 RAD3.2 | length 5.8
  Top Layer w0.254: RAD3.1@67.056,93.674 67.056,95.504 RAD3.2@68.326,96.774 67.945,97.155 R7.1@67.945,98.806
NetR8_2: R8.2 RAD4.2 RAD4.3 | length 6
  Top Layer w0.254: R8.2@86.995,99.568 RAD4.2@86.995,97.155 88.265,95.885 RAD4.3@88.265,94.055
NetR9_1: R9.1 RAD5.1 RAD5.2 | length 5.8
  Top Layer w0.254: RAD5.1@67.056,85.419 67.056,87.249 RAD5.2@68.326,88.519 67.945,88.9 R9.1@67.945,90.551
NetR10_2: R10.2 RAD6.2 RAD6.3 | length 6.2
  Top Layer w0.254: R10.2@86.995,91.186 RAD6.2@86.995,88.646 88.265,87.376 RAD6.3@88.265,85.546
NetR11_1: R11.1 RAD7.1 RAD7.2 | length 5.9
  Top Layer w0.254: RAD7.1@67.056,77.47 67.056,79.3 RAD7.2@68.326,80.57 67.818,81.078 R11.1@67.818,82.677
NetR12_2: R12.2 RAD8.2 RAD8.3 | length 6.1
  Top Layer w0.254: R12.2@87.249,82.931 RAD8.2@87.249,80.443 88.519,79.173 RAD8.3@88.519,77.343
NetR13_1: R13.1 RAD9.1 RAD9.2 | length 6
  Top Layer w0.254: RAD9.1@67.056,68.782 67.056,70.612 RAD9.2@68.326,71.882 67.818,72.39 67.818,73.914 R13.1@67.945,74.041
NetR14_2: R14.2 RAD10.2 RAD10.3 | length 6
  Top Layer w0.254: R14.2@87.249,74.549 RAD10.2@87.249,72.136 88.519,70.866 RAD10.3@88.519,69.036
NetR47_1: R47.1 U12.1 | length 2.5
  Top Layer w0.254: R47.1@26.67,47.244 26.685,47.259 U12.1@29.21,47.259
NetR48_1: R48.1 SW1.1 SW1.6 | length 10.8
  Top Layer w0.254: SW1.6@20.894,42.418 21.148,42.164 R48.1@25.146,42.164 R48.1@24.892,42.418
  Bottom Layer w0.254: SW1.1@14.859,42.418 SW1.1@15.494,42.418 SW1.6@20.894,42.418
NetR49_1: R49.1 SW1.2 SW1.5 U12.2 | length 16.4
  Top Layer w0.254: SW1.5@20.259,44.918 SW1.5@20.894,44.918 23.154,44.918 23.495,44.577 25.019,44.577 R49.1@25.146,44.704 25.146,45.466 25.654,45.974 27.813,45.974 28.448,46.609 U12.2@29.21,46.609
  Bottom Layer w0.254: SW1.2@14.859,44.918 SW1.2@15.494,44.918 SW1.5@20.894,44.918
NetR53_1: R53.1 U20.18 | length 23.2
  Top Layer w0.254: v1(68.199,41.529) 68.199,45.847 70.104,47.752 U20.18@73.406,47.752 ; v1(77.978,36.576) R53.1@78.994,36.576
  Bottom Layer w0.254: v1(68.199,41.529) 71.374,38.354 76.2,38.354 v1(77.978,36.576)
NetR53_2: R53.2 U22.2 | length 16
  Top Layer w0.254: U22.2@80.01,23.176 v1(80.01,26.035) ; R53.2@80.518,36.576 v1(81.661,36.576)
  Bottom Layer w0.254: v1(80.01,26.035) 82.55,28.575 82.55,35.687 v1(81.661,36.576)
NetR54_1: R54.1 U20.16 | length 21
  Top Layer w0.254: v1(69.342,41.656) 69.342,43.053 71.501,45.212 U20.16@73.406,45.212 ; v1(77.978,35.052) R54.1@78.994,35.052
  Bottom Layer w0.254: v1(69.342,41.656) 72.009,38.989 76.708,38.989 78.867,36.83 78.867,35.941 v1(77.978,35.052)
NetR54_2: R54.2 U22.3 | length 14.2
  Top Layer w0.254: U22.3@78.74,23.176 v1(78.74,26.035) ; R54.2@80.518,35.052 v1(81.661,35.052)
  Bottom Layer w0.254: v1(78.74,26.035) 81.661,28.956 v1(81.661,35.052)
NetR55_1: R55.1 U20.14 | length 10.5
  Top Layer w0.254: R55.1@67.056,36.576 v1(68.199,36.576) ; v1(68.199,38.989) 68.199,39.37 71.501,42.672 U20.14@73.406,42.672
  Bottom Layer w0.254: v1(68.199,36.576) v1(68.199,38.989)
NetR55_2: R55.2 U23.2 | length 15
  Top Layer w0.254: v1(64.516,36.576) R55.2@65.532,36.576 ; U23.2@65.659,23.114 v1(65.659,26.035)
  Bottom Layer w0.254: v1(64.516,36.576) 65.659,35.433 v1(65.659,26.035)
NetR56_2: R56.2 U2.9 | length 5.6
  Top Layer w0.254: R56.2@15.24,15.494 19.05,15.494 19.518,15.026 U2.9@19.518,13.934
NetR58_2: R58.2 U9.1 | length 3.4
  Top Layer w0.254: R58.2@67.31,102.997 68.199,102.997 69.342,104.14 U9.1@69.342,105.029
NetR59_1: R59.1 U9.7 | length 3.3
  Top Layer w0.61: R59.1@60.706,106.934 61.976,106.934 62.611,106.299 U9.7@63.754,106.299
NetR60_1: R60.1 U20.12 | length 10.1
  Top Layer w0.254: R60.1@67.056,35.052 v1(68.199,35.052) ; v1(69.342,38.989) 70.485,40.132 U20.12@73.406,40.132
  Bottom Layer w0.254: v1(68.199,35.052) 69.342,36.195 v1(69.342,38.989)
NetR60_2: R60.2 U23.3 | length 13
  Top Layer w0.254: U23.3@64.389,23.114 v1(64.389,26.035) ; v1(64.516,35.052) R60.2@65.532,35.052
  Bottom Layer w0.254: v1(64.389,26.035) 64.389,27.432 64.516,27.559 v1(64.516,35.052)
NetR61_1: R61.1 U20.9 | length 11
  Top Layer w0.254: R61.1@53.213,36.576 v1(54.229,36.576) ; v1(60.96,40.132) U20.9@62.738,40.132
  Bottom Layer w0.254: v1(54.229,36.576) 56.007,38.354 59.182,38.354 v1(60.96,40.132)
NetR61_2: R61.2 U24.2 | length 14.8
  Top Layer w0.254: v1(50.673,36.576) R61.2@51.689,36.576 ; U24.2@51.689,23.176 v1(51.689,26.416)
  Bottom Layer w0.254: v1(50.673,36.576) 51.689,35.56 v1(51.689,26.416)